# EAGLE board GroundStationCR-old (EAGLE 7.7.0)
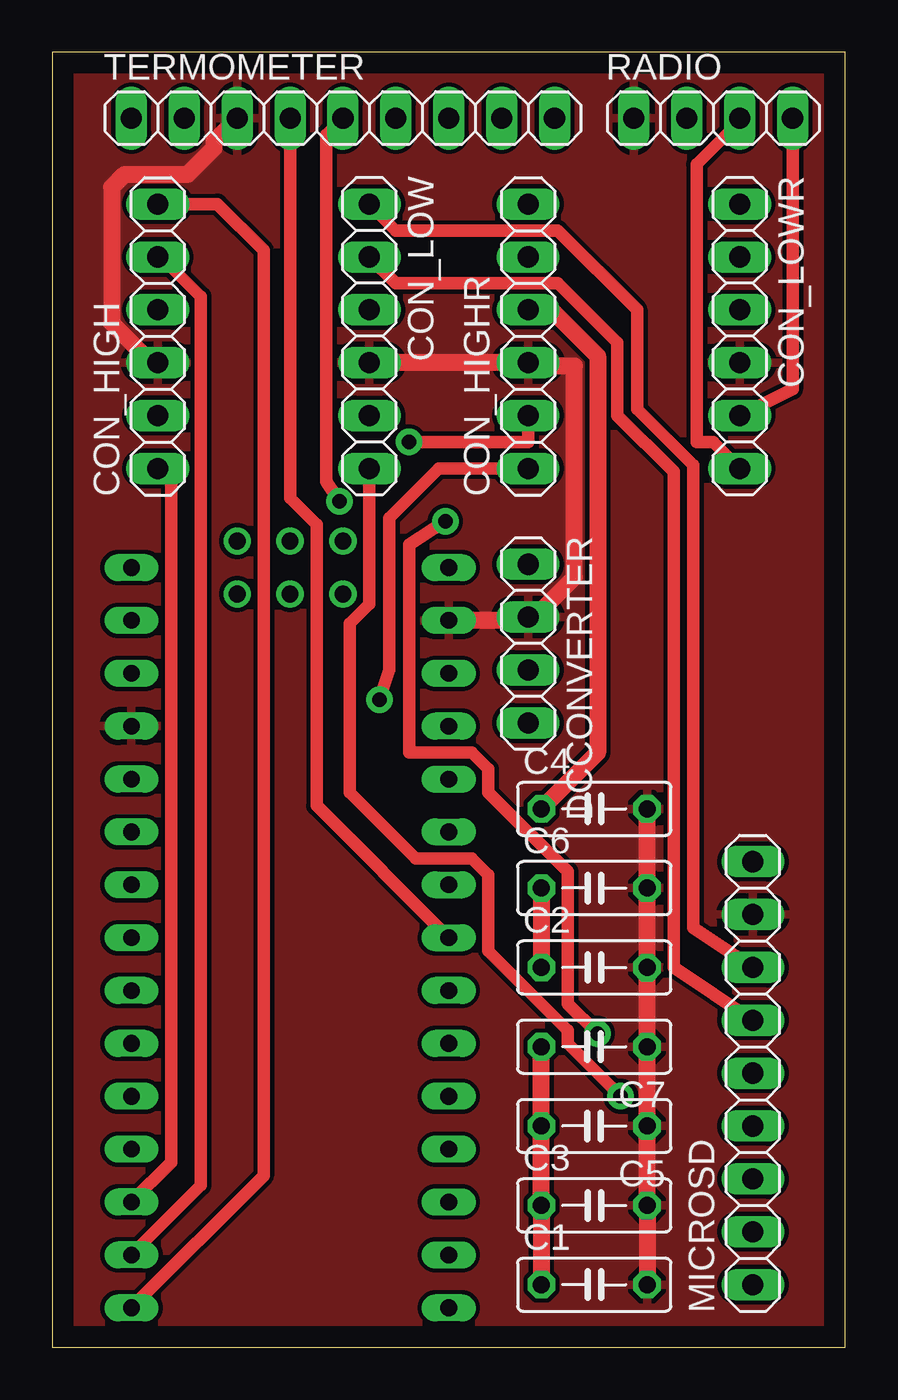
[diagram p0: board, top side]
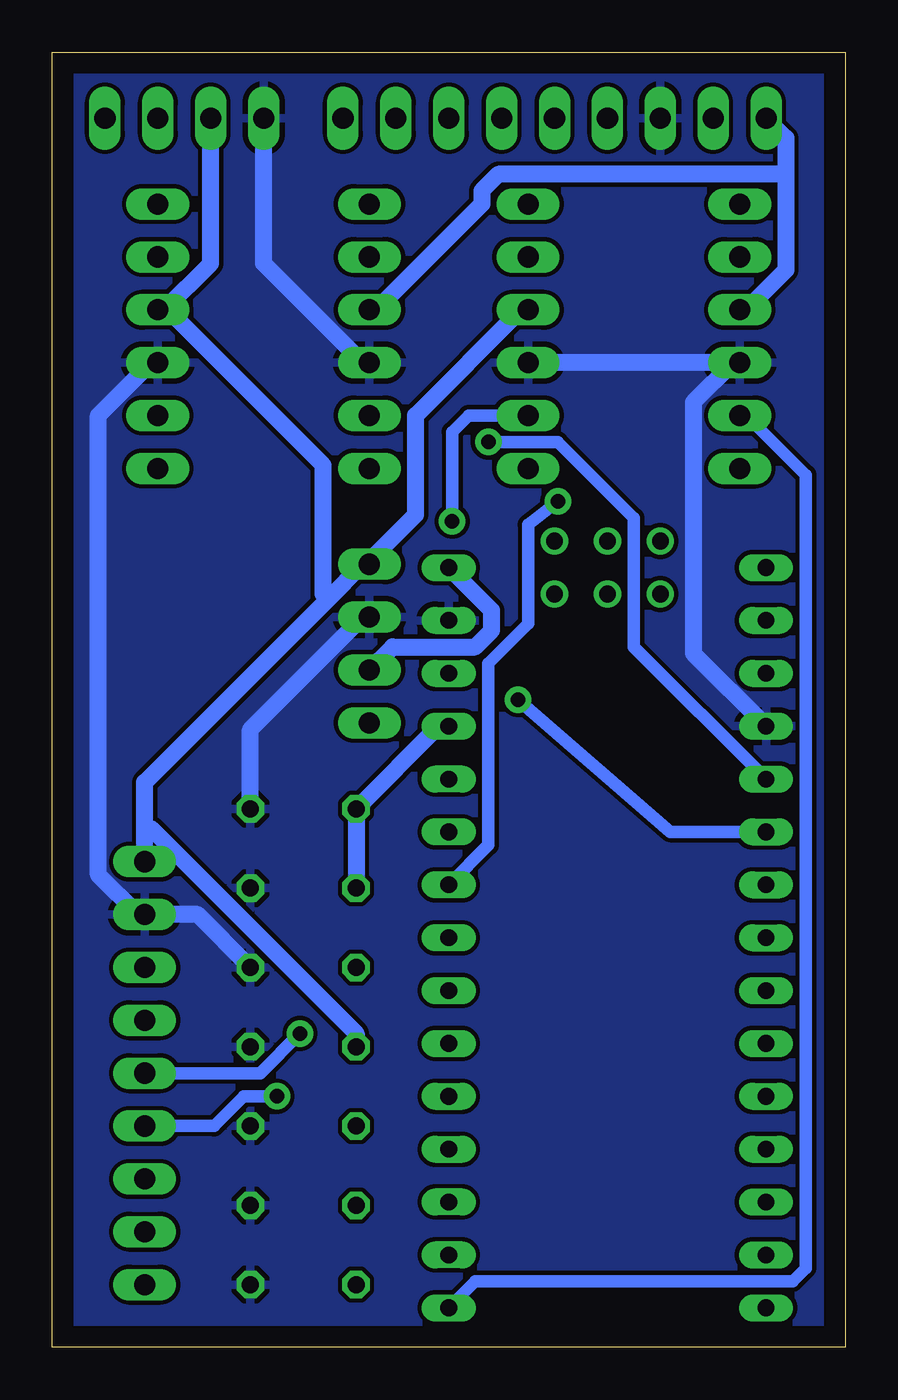
[diagram p1: board, bottom side, seen from below]

Size 38.1 x 62.23 mm. Coordinates in mm from the lower left corner, seen from the top.
Outline: 0,0 38.1,0 38.1,62.23 0,62.23 0,0
Copper layers (1*16): Top 0.035mm / dielectric 1.5mm / Bottom 0.035mm
Design rules "default": minimum track width 10mil, minimum drill 24mil, track to track 8mil, track to pad 8mil, pad to pad 8mil, via to via 8mil, smd to smd 8mil, copper to edge 40mil, drill to drill 8mil, minimum pad ring 10mil, minimum via ring 8mil, stop-mask expansion 4mil, vias tented up to drill 0mil, thermal gap 10mil
Net classes: 0 default: width 0.61 mm; 1 GND: width 0.813 mm; 2 +5V: width 0.813 mm; 3 3.3V: width 0.813 mm; 4 VIN: width 0.813 mm

## Footprints (pad centres in the part's own frame; a part is rotated, then mirrored left to right if it is on the bottom)
C050-025X075 = drill 0.813 octagon: 1 -2.54,0; 2 2.54,0
1X06 = drill 1.016 long: 1 -6.35,0; 2 -3.81,0; 3 -1.27,0; 4 1.27,0; 5 3.81,0; 6 6.35,0
1X04 = drill 1.016 long: 1 -3.81,0; 2 -1.27,0; 3 1.27,0; 4 3.81,0
1X09 = drill 1.016 long: 1 -10.16,0; 2 -7.62,0; 3 -5.08,0; 4 -2.54,0; 5 0,0; 6 2.54,0; 7 5.08,0; 8 7.62,0; 9 10.16,0
NANO = drill 0.8 long: 3.3V -10.16,24.13; 5V -10.16,-1.27; A0 -10.16,19.05; A1 -10.16,16.51; A2 -10.16,13.97; A3 -10.16,11.43; A4 -10.16,8.89; A5 -10.16,6.35; A6 -10.16,3.81; A7 -10.16,1.27; AREF -10.16,21.59; D2 5.08,1.27; D3 5.08,3.81; D4 5.08,6.35; D5 5.08,8.89; D6 5.08,11.43; D7 5.08,13.97; D8 5.08,16.51; D9 5.08,19.05; D10 5.08,21.59; D11 5.08,24.13; D12 5.08,26.67; D13 -10.16,26.67; GND -10.16,-6.35; GND1 5.08,-1.27; RAW -10.16,-8.89; RST -10.16,-3.81; RST1 5.08,-3.81; RX1 5.08,-6.35; TX0 5.08,-8.89 | drill 0.8: ICSP1 -5.08,-10.16; ICSP2 -5.08,-7.62; ICSP3 -2.54,-10.16; ICSP4 -2.54,-7.62; ICSP5 0,-10.16; ICSP6 0,-7.62

## Placement (x,y rotation side)
C1  [C050-025X075]  26.04,3.02 0 top
C2  [C050-025X075]  26.04,18.26 0 top
C3  [C050-025X075]  26.04,6.83 0 top
C4  [C050-025X075]  26.04,25.88 0 top
C5  [C050-025X075]  26.04,10.64 180 top
C6  [C050-025X075]  26.04,22.07 0 top
C7  [C050-025X075]  26.04,14.45 180 top
CON_HIGH  [1X06]  5.08,48.58 90 top
CON_HIGHR  [1X06]  22.86,48.58 90 top
CON_LOW  [1X06]  15.24,48.58 270 top
CON_LOWR  [1X06]  33.02,48.58 270 top
DCCONVERTER  [1X04]  22.86,33.81 270 top
MICROSD  [1X09]  33.66,13.18 90 top
RADIO  [1X04]  31.75,59.05 0 top
TERMOMETER  [1X09]  13.97,59.05 0 top
U$1  NANO  [NANO]  8.89,28.57 180 top

## Library data of the parts
C1-C7 = resistor
CON_HIGH CON_HIGHR CON_LOW CON_LOWR DCCONVERTER MICROSD RADIO TERMOMETER = pinhead
U$1 = Arduino-clone

## Nets
3.3V [3.3V]: C1.1 C3.1 C5.2 C7.2 CON_LOW.3 CON_LOWR.3 DCCONVERTER.1 MICROSD.9 RADIO.2
+5V [+5V]: C2.1 C4.1 C6.1 CON_HIGH.4 CON_HIGHR.4 TERMOMETER.1 U$1.5V
CS: CON_HIGH.1 U$1.D10
CS_L: CON_LOW.6 MICROSD.4
GND [GND]: C1.2 C2.2 C3.2 C4.2 C5.1 C6.2 C7.1 CON_HIGH.3 CON_HIGHR.3 CON_LOW.4 CON_LOWR.4 DCCONVERTER.2 MICROSD.8 RADIO.1 TERMOMETER.3 U$1.GND U$1.GND1
MISO: CON_HIGH.6 U$1.D12
MISO_L: CON_LOW.1 MICROSD.7
MOSI: CON_HIGH.5 U$1.D11
MOSI_L: CON_LOW.2 MICROSD.6
RX: CON_HIGHR.1 U$1.D3
RXL: CON_LOWR.6 RADIO.3
SCL: TERMOMETER.5 U$1.A5
SCLK: CON_HIGH.2 U$1.D13
SCLK_L: CON_LOW.5 MICROSD.5
SDA: TERMOMETER.4 U$1.A4
TX: CON_HIGHR.2 U$1.D2
TXL: CON_LOWR.5 RADIO.4
VIN [VIN]: DCCONVERTER.3 U$1.RAW

## Tracks (layer width: path | path; a pad name or v marks a point on that pad's centre or on a via)
3.3V
  Top 0.813: C1.1 C3.1 C5.2 C7.2
  Bottom 0.813: RADIO.2 30.48,52.07 32.7,49.85 CON_LOWR.3 32.38,49.69 25.08,42.39 25.08,36.2 24.84,35.96 | 24.84,35.96 33.66,27.15 33.66,24.92 | 24.84,35.96 23.18,37.62 DCCONVERTER.1 22.7,37.94 20.64,40.01 20.64,44.77 15.56,49.85 CON_LOW.3 | MICROSD.9 33.66,24.92 | C7.2 23.5,15.08 33.34,24.92 33.66,24.92
+5V
  Top 0.813: C6.1 C2.1 | C4.1 26.19,28.57 26.19,47.62 23.97,49.85 CON_HIGHR.4
  Bottom 0.813: U$1.5V 19.53,29.84 C4.1 C6.1 | CON_HIGH.4 4.76,49.85 2.86,51.75 2.86,56.36 | 2.86,56.36 2.86,58.1 TERMOMETER.1 | CON_HIGHR.4 22.54,49.85 17.46,54.93 17.46,55.56 16.67,56.36 2.86,56.36
CS
  Top 0.61: U$1.D10 5.71,8.89 5.71,41.59 CON_HIGH.1
CS_L  (via drill 0.7 pad 1.27)
  Top 0.61: v27.3,12.06 24.77,14.61 24.77,15.24 20.95,19.05 20.95,22.7 20.16,23.5 17.46,23.5 14.29,26.67 14.29,34.77 15.24,35.72 CON_LOW.6
  Bottom 0.61: MICROSD.4 30.32,10.64 28.89,12.06 v27.3,12.06
GND
  Top 0.813: CON_LOW.4 CON_HIGHR.3 23.18,47.15 25.08,47.15 25.08,36.99 23.18,35.08 DCCONVERTER.2 22.86,34.92 U$1.GND | TERMOMETER.3 7.78,57.94 7.78,57.63 6.51,56.36 3.49,56.36 2.86,55.72 2.86,49.21 4.76,47.31 CON_HIGH.3 | C1.2 C3.2 C5.1 C7.1 C2.2 C6.2 C4.2
  Bottom 0.813: RADIO.1 27.94,52.07 23.18,47.31 CON_HIGHR.3 | U$1.GND1 7.3,33.34 7.3,45.4 5.4,47.31 CON_HIGH.3 CON_LOW.4 | C2.2 31.11,20.8 MICROSD.8 33.97,20.8 35.88,22.7 35.88,44.77 33.34,47.31 CON_LOWR.4 | DCCONVERTER.2 23.18,35.08 28.57,29.69 C4.2
  pour Top: -2.54,63.5 -2.54,-1.27 40.64,-1.27 40.64,63.5
  pour Bottom: -2.54,63.5 -2.54,-2.54 41.91,-2.54 41.91,64.77 -2.54,64.77
MISO
  Top 0.61: CON_HIGH.6 7.94,54.93 10.16,52.7 10.16,8.26 U$1.D12
MISO_L
  Top 0.61: MICROSD.7 30.8,20.16 30.8,42.39 28.1,45.09 28.1,49.85 24.29,53.66 16.51,53.66 CON_LOW.1
MOSI
  Top 0.61: U$1.D11 7.14,7.78 7.14,50.48 5.24,52.39 CON_HIGH.5
MOSI_L
  Top 0.61: MICROSD.6 29.84,18.26 29.84,42.07 27.15,44.77 27.15,48.26 24.29,51.12 16.51,51.12 CON_LOW.2
RX  (via drill 0.7 pad 1.27)
  Top 0.61: v15.72,31.11 16.19,32.54 16.19,39.85 18.57,42.23 CON_HIGHR.1
  Bottom 0.61: U$1.D3 8.41,24.77 v15.72,31.11
RXL
  Top 0.61: CON_LOWR.6 31.75,43.5 30.96,43.5 30.96,56.83 33.02,58.9 RADIO.3
SCL  (via drill 0.7 pad 1.27)
  Top 0.61: v13.81,40.64 13.18,41.59 13.18,58.26 TERMOMETER.5
  Bottom 0.61: U$1.A5 17.14,24.13 17.14,32.86 15.24,34.77 15.24,39.53 v13.81,40.64
SCLK
  Bottom 0.61: CON_HIGH.2 4.76,44.77 1.91,41.91 1.91,3.81 2.54,3.17 17.78,3.17 U$1.D13
SCLK_L  (via drill 0.7 pad 1.27)
  Top 0.61: v26.19,15.08 24.77,16.51 24.77,22.86 20.95,26.67 20.95,27.78 20.16,28.57 17.14,28.57 17.14,38.58 v18.89,39.69
  Bottom 0.61: MICROSD.5 28.1,13.18 v26.19,15.08 | v18.89,39.69 18.89,43.97 18.1,44.77 CON_LOW.5
SDA
  Top 0.61: U$1.A4 12.7,26.04 12.7,39.53 11.43,40.8 TERMOMETER.4
TX  (via drill 0.7 pad 1.27)
  Top 0.61: v17.14,43.5 22.86,43.5 CON_HIGHR.2
  Bottom 0.61: U$1.D2 10.16,33.66 10.16,39.85 13.81,43.5 v17.14,43.5
TXL
  Top 0.61: CON_LOWR.5 35.56,46.04 RADIO.4
VIN
  Bottom 0.813: U$1.RAW 16.99,35.4 16.99,34.45 17.78,33.66 21.75,33.66 DCCONVERTER.3